# EAGLE board Wisp v02 (EAGLE 6.5.0)
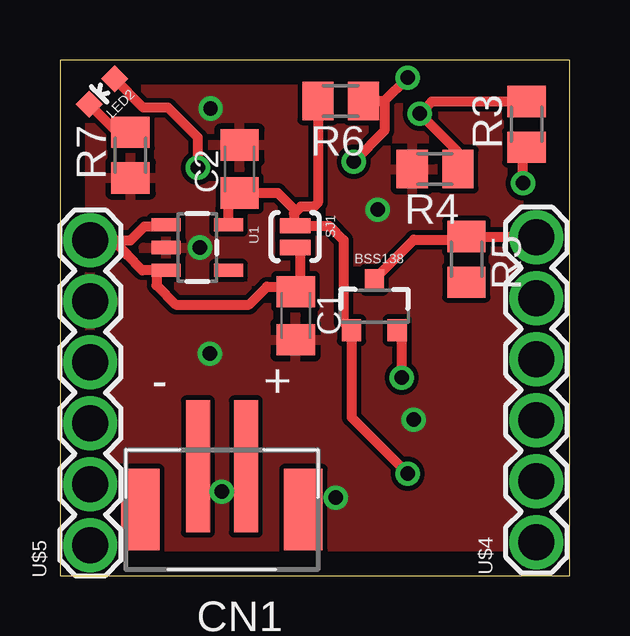
[diagram p0: board, top side]
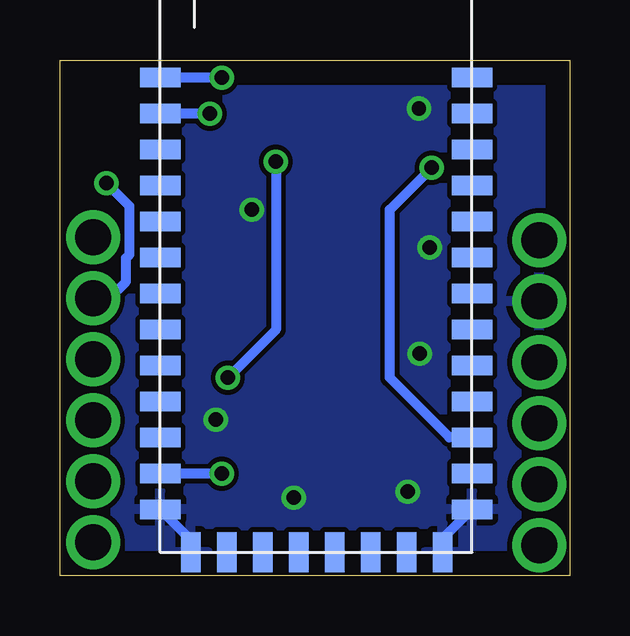
[diagram p1: board, bottom side, seen from below]

Size 21.25 x 21.48 mm. Coordinates in mm from the lower left corner, seen from the top.
Outline: 0,21.48 0,0 21.25,0 21.25,21.48 0,21.48
Copper layers (1*16): Top 0.035mm / dielectric 1.5mm / Bottom 0.035mm
Design rules "default": minimum track width 10mil, minimum drill 24mil, track to track 8mil, track to pad 8mil, pad to pad 8mil, via to via 8mil, smd to smd 8mil, copper to edge 40mil, drill to drill 8mil, minimum pad ring 10mil, minimum via ring 8mil, stop-mask expansion 4mil, vias tented up to drill 0mil, thermal gap 10mil

## Footprints (pad centres in the part's own frame; a part is rotated, then mirrored left to right if it is on the bottom)
SOT23-3 = smd 0.8 x 0.9: 1 -0.95,-1; 2 0.95,-1; 3 0,1.1
C0805K = smd 1.3 x 1.6: 1 -1,0; 2 1,0
JST-PH-2-SMT = smd 1 x 5.5: 1 -1,-1.8; 2 1,-1.8 | smd 1.6 x 3.4: NC1 -3.4,0; NC2 3.4,0
LED-0603 = smd 0.8 x 0.8: A 0,-0.75; C 0,0.75
M0805 = smd 1.3 x 1.6: 1 -0.95,0; 2 0.95,0
SJ_2S-NO = smd 0.635 x 1.27: 1 -0.45,0; 2 0.45,0
SOT23-5 = smd 0.55 x 1.2: 1 -0.95,-1.3; 2 0,-1.3; 3 0.95,-1.3; 4 0.95,1.3; 5 -0.95,1.3
BLE-HM-10 = smd 1.676 x 0.813: 3.3V 0,3.29; AIO0 0,7.79; AIO1 0,6.29; GND1 0,1.79; GND4 13,1.79; PCM_CLK 0,13.79; PCM_IN 0,10.79; PCM_OUT 0,12.29; PCM_SYNC 0,9.29; PIO0 13,3.29; PIO1 13,4.79; PIO2 13,6.29; PIO3 13,7.79; PIO4 13,9.29; PIO5 13,10.79; PIO6 13,12.29; PIO7 13,13.79; PIO8 13,15.29; PIO9 13,16.79; PIO10 13,18.29; PIO11 13,19.79; RESET 0,4.79; UART_CTS 0,16.79; UART_RTS 0,15.29; UART_RX 0,18.29; UART_TX 0,19.79 | smd 0.813 x 1.676: GND2 1.27,0; GND3 11.77,0; SPI_CLK 8.77,0; SPI_CSB 4.27,0; SPI_MISO 7.27,0; SPI_MOSI 5.77,0; USB_D+ 10.27,0; USB_D- 2.77,0
1X6_SHORT_ROUND = drill 1.5 pad 2.2: 1 1.27,-1.27; 2 3.81,-1.27; 3 6.35,-1.27; 4 8.89,-1.27; 5 11.43,-1.27; 6 13.97,-1.27

## Placement (x,y rotation side)
BSS138  MOSFET-NCHANNELSMD  [SOT23-3]  13.11,11.23 0 top
C1  1uF  [C0805K]  9.83,10.83 270 top
C2  1uF  [C0805K]  7.49,16.95 90 top
CN1  [JST-PH-2-SMT]  6.75,2.75 180 top
LED2  [LED-0603]  1.76,20.17 135 top
R3  10k  [M0805]  19.45,18.8 90 top
R4  10k  [M0805]  15.64,16.94 180 top
R5  10k  [M0805]  16.95,13.18 270 top
R6  10k  [M0805]  11.71,19.78 180 top
R7  220  [M0805]  2.94,17.52 90 top
SJ1  SOLDERJUMPERNO  [SJ_2S-NO]  9.81,14.13 270 top
U1  V_REG_LDOSMD  [SOT23-5]  5.73,13.67 270 top
U$1  BLE-HM-10  [BLE-HM-10]  17.06,0.97 0 bottom
U$4  1X6_SHORT_ROUND  [1X6_SHORT_ROUND]  18.6,0.12 90 top
U$5  1X6_SHORT_ROUND  [1X6_SHORT_ROUND]  0,0 90 top

## Library data of the parts
BSS138 LED2 SJ1 U1 = SparkFun
C1 C2 R3-R7 = resistor
CN1 = adafruit
U$1 = Random parts
U$4 U$5 = Random parts(01-14-14)

## Nets
3_3V: BSS138.1 C2.1 R6.2 SJ1.1 U1.5 U$1.3.3V
5V: R5.2
GND: C1.2 C2.2 R4.2 R7.1 U1.2 U$1.GND1 U$1.GND2 U$1.GND3 U$1.GND4 U$5.5
HVTX->LVRX: R3.2 R4.1 U$1.UART_RX
LVRX->HVTX: BSS138.2 R6.1 U$1.UART_TX
N$2: LED2.A U$1.PIO1
N$26: LED2.C R7.2
RAW: C1.1 SJ1.2 U1.1 U1.3 U$5.6
RX_HV: BSS138.3 R5.1 U$4.6
TX_HV: R3.1 U$4.5

## Tracks (layer width: path | path; a pad name or v marks a point on that pad's centre or on a via)
3_3V  (via drill 0.6)
  Top 0.406: U1.5 7.03,15.49 C2.1 9.08,15.95 9.75,15.27 9.75,15.09 | 9.75,15.09 9.75,14.63 SJ1.1 11.23,14.58 11.82,13.98 11.82,10.56 BSS138.1 12.16,6.59 v14.5,4.25 | R6.2 10.76,15.53 10.6,15.38 10.04,15.38 9.75,15.09
  Bottom 0.406: v14.5,4.25 U$1.3.3V
GND  (via drill 0.6)
  Bottom 0.406: U$1.GND2 15.79,1.49 U$1.GND1 | U$1.GND3 5.29,1.53 U$1.GND4
  other vias: 13.25,15.25 6.25,9.25 6.28,19.46 6.75,3.5 14.75,6.5 11.5,3.25 5.83,13.67
  pour Bottom: 0,21.5 0,-0.5 21.75,-0.5 22,-0.5 22,21.5
  pour Top: 0,21.25 0,-0.75 21.75,-0.75 22,-0.75 22,21.25
HVTX->LVRX  (via drill 0.6)
  Top 0.406: R3.2 15.5,19.75 v15,19.25 16.59,17.66 R4.1
  Bottom 0.406: v15,19.25 U$1.UART_RX
LVRX->HVTX  (via drill 0.6)
  Top 0.406: R6.1 13.53,19.78 | 13.53,19.78 v14.5,20.75 | 13.53,19.78 13.53,18.53 v12.25,17.25 | v14.25,8.25 14.25,10.04 BSS138.2
  Bottom 0.406: v14.5,20.75 U$1.UART_TX | v12.25,17.25 12.25,10.25 v14.25,8.25
N$2  (via drill 0.6)
  Top 0.406: v5.75,17 5.75,18.25 4.5,19.5 3.47,19.5 LED2.A
  Bottom 0.406: U$1.PIO1 5.01,5.76 7.5,8.25 7.5,15.25 v5.75,17
N$26
  Top 0.406: R7.2 2.38,18.47 LED2.C
RAW
  Top 0.406: U$5.6 2.22,13.97 | 2.22,13.97 2.95,13.97 3.53,14.55 4.36,14.55 U1.1 | 2.22,13.97 2.79,13.39 2.79,13.36 3.44,12.72 U1.3 4.11,12.72 4.03,12.63 4.03,12.1 4.83,11.29 7.88,11.29 8.63,12.04 9.9,12.04 9.91,12.05 9.91,11.92 C1.1 10,12 10,13.5 SJ1.2
RX_HV
  Top 0.406: BSS138.3 13.11,12.36 14.75,14 16.82,14 R5.1 19.84,14.13 U$4.6
TX_HV  (via drill 0.6)
  Top 0.406: v19.31,16.35 19.31,17.71 R3.1
  Bottom 0.406: U$4.5 19.2,11.55 18.5,12.25 18.5,13.23 18.35,13.38 18.35,15.39 v19.31,16.35